# Altium PCB 超声波接近电路.PcbDoc
Units mil, origin at the board's own origin, x right, y up, seen from the top; angles counter-clockwise.
Board outline 6000 x 4000 mil, 2 copper layers (Top Layer, Bottom Layer); 48 components, 105 nets, 234 pads, 0 vias.
Unrouted connection lines stored in the file: 115.
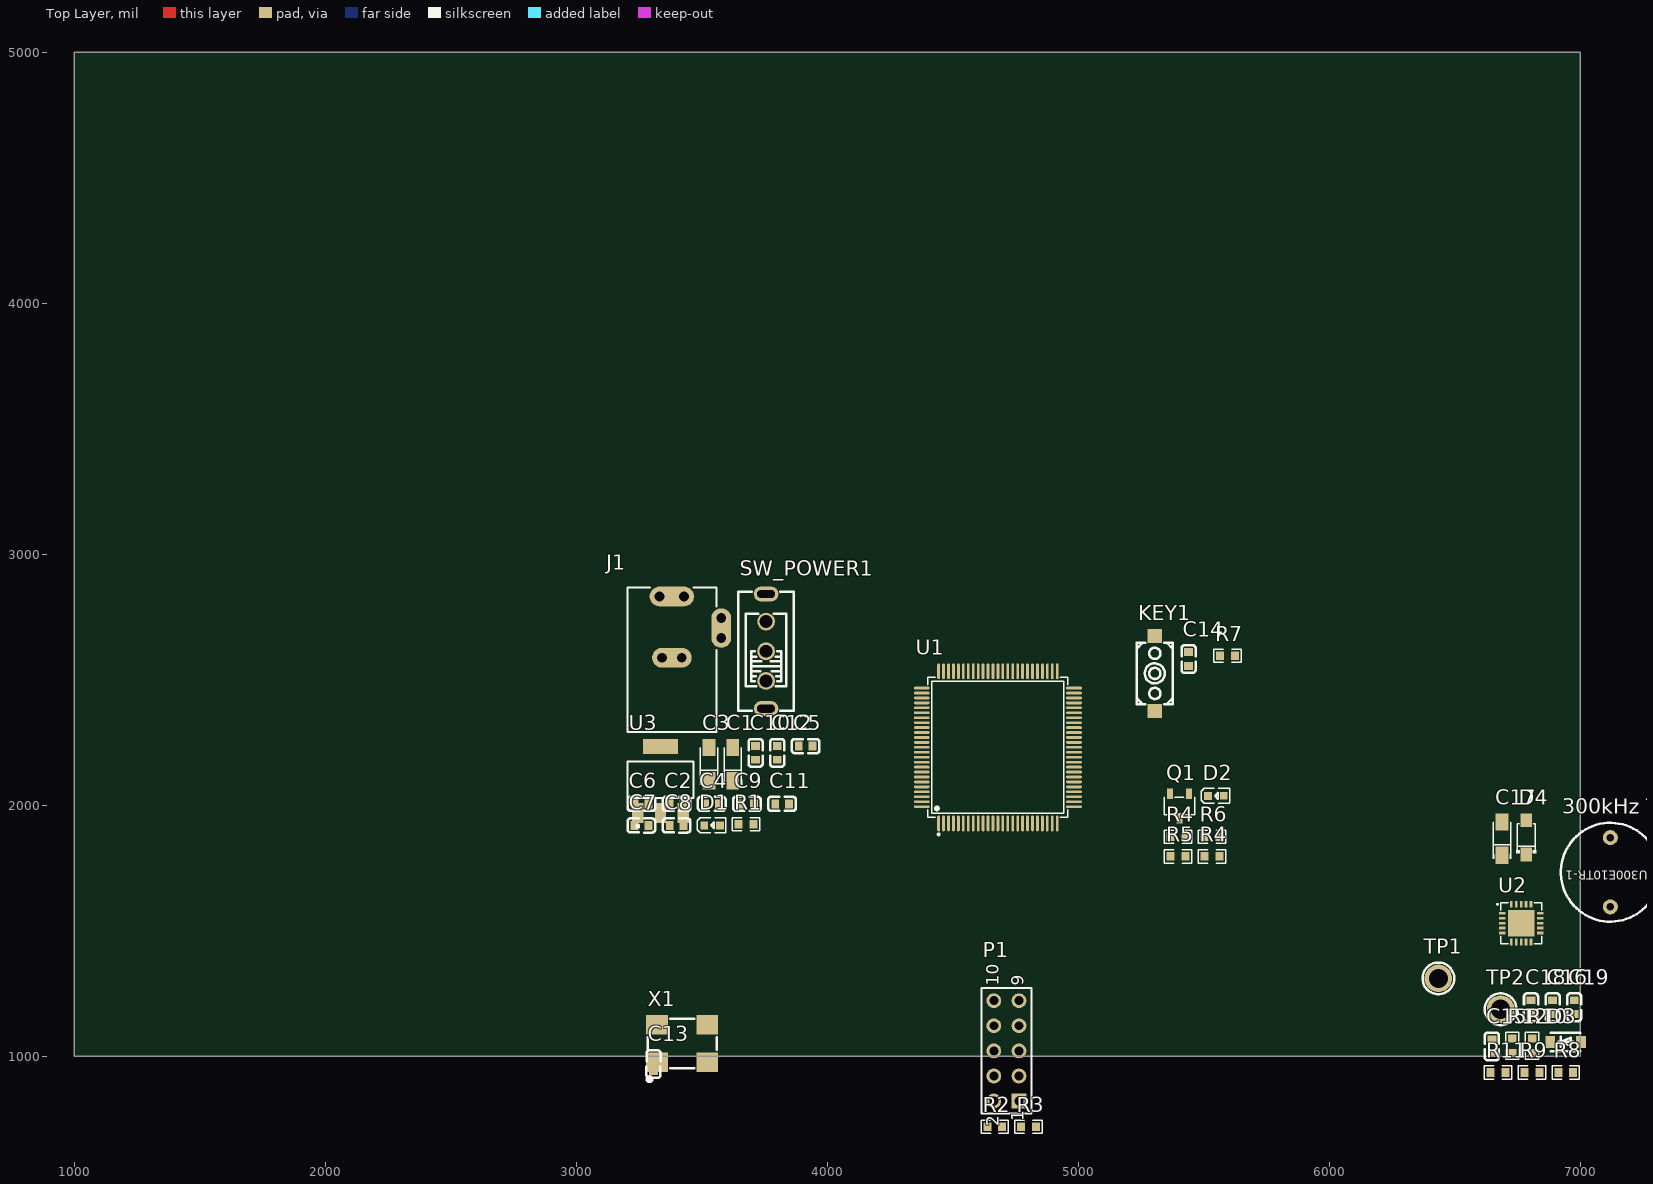
[diagram p0: Top Layer view]
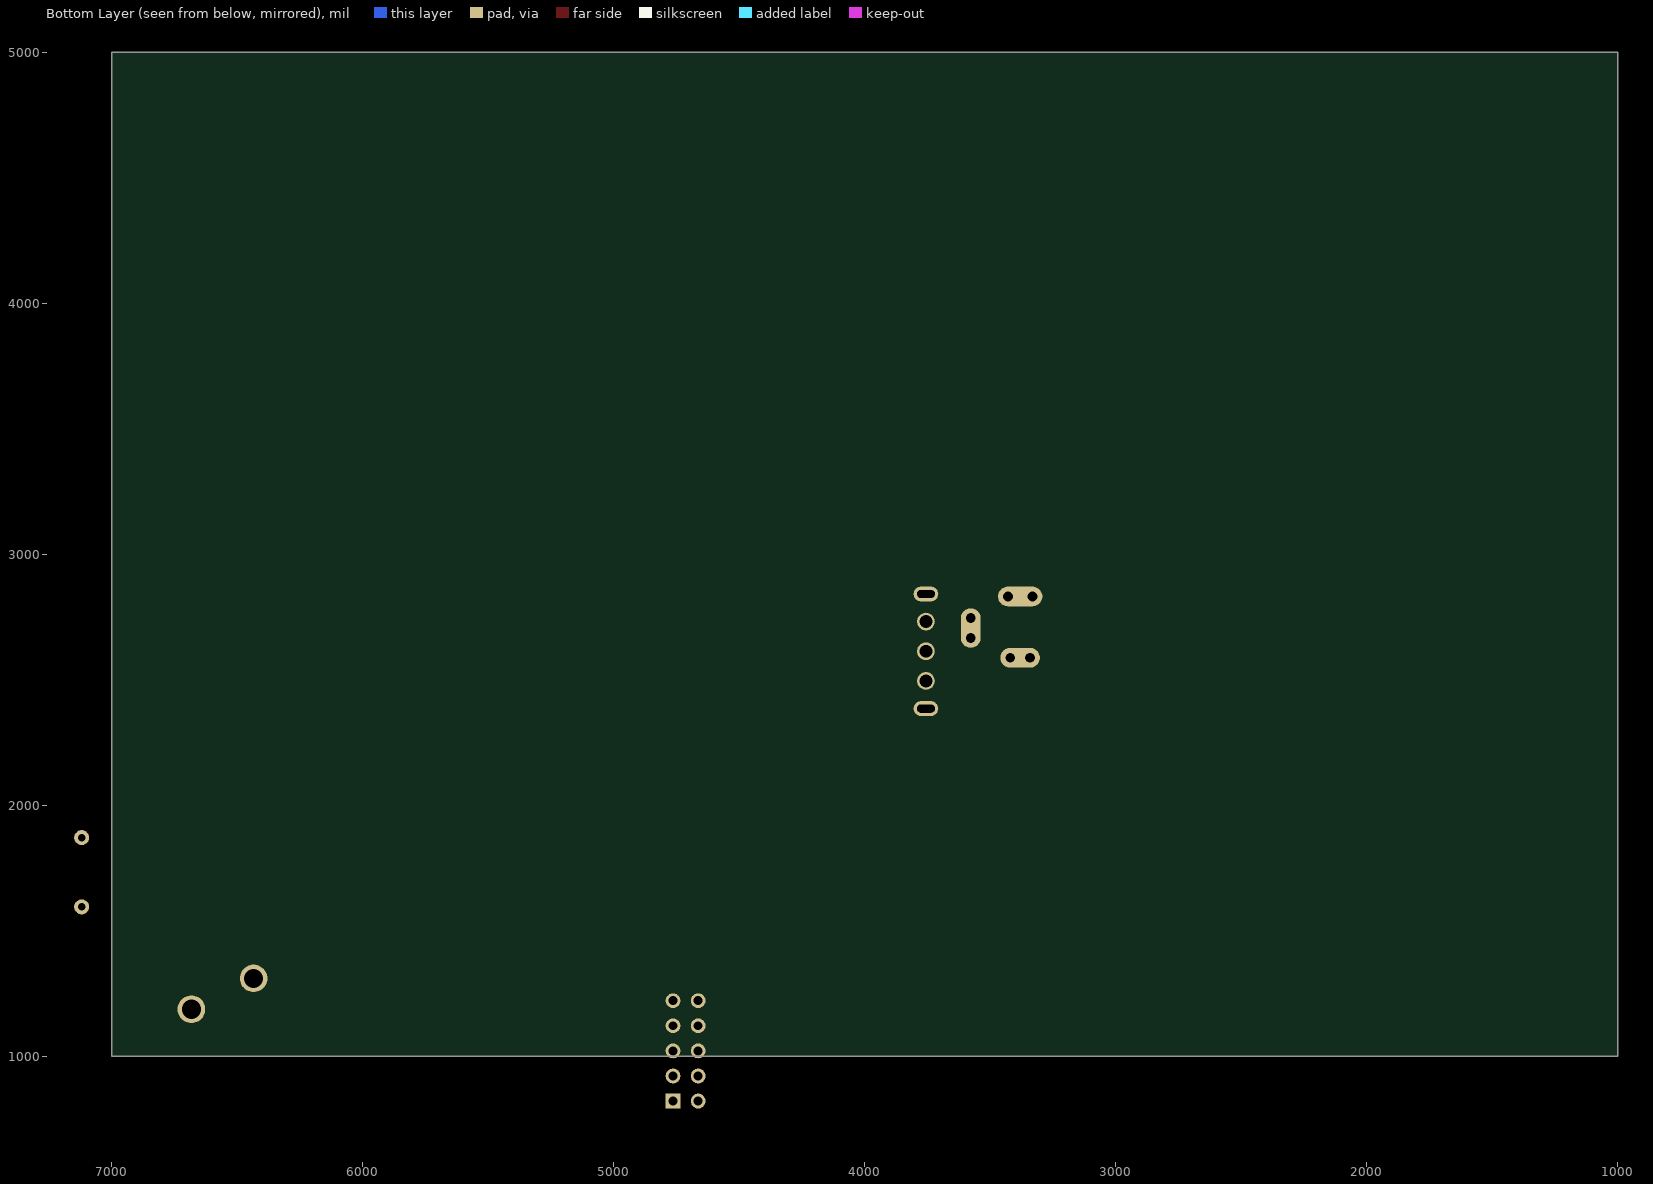
[diagram p1: Bottom Layer view, seen from below]

## Layer stack, top to bottom
Top Solder: solder mask 0.4, Solder Resist, Dk 3.5
Top Layer: signal copper 1.4
Dielectric 1: dielectric 12.6, FR-4, Dk 4.8
Bottom Layer: signal copper 1.4
Bottom Solder: solder mask 0.4, Solder Resist, Dk 3.5

## Board outline
1000,1000 7000,1000 7000,5000 1000,5000

## Design rules (kind name [scope] priority, off if disabled: settings)
Clearance [All] p1: gap=10 ignorepadtopadclearanceinfootprint=FALSE except(0: Arc-Hole Track-Hole SMDPad-Hole THPad-Hole Via-Hole Fill-Hole Poly-Hole Region-Hole Text-Hole)
PolygonConnect [All] p1: connectstyle=Relief reliefconductorwidth=10 reliefentries=4 polygonreliefangle="90 Angle" airgapwidth=10
RoomDefinition 超声波接近电路2-15 [InComponentClass('超声波接近电路2-15')] p1: confinementstyle=ConfineIn formatcopy=TRUE lockcomponents=FALSE outline 0,0 2000,0 2000,1000 0,1000
RoutingVias [All] p1: holewidth=28 width=50 viastyle="Through Hole" minholewidth=28 minwidth=50 maxholewidth=28 maxwidth=50
SolderMaskExpansion [All] p1: expansion=4 istentingtop=FALSE
Width [All] p1: maxlimit=10 minlimit=10 preferedwidth=10
30 further rules are at their usual default settings.

## Components (designator, comment, footprint, x,y, rotation, side; value= is the part's Value field where it differs from the comment)
"300kHz Transducer" "NU300E10TR-1" NU300E10TR-1 7120,1870.59 r180 top
C1 "Cap Pol1" CAP-SMD_L3.2-W1.6-RD 3624.14,2106.95 r90 top value=100uF
C2 "Cap" C0603 3372.84,2005.19 r0 top value=0.1uF
C3 "Cap Pol1" CAP-SMD_L3.2-W1.6-RD 3529.15,2106.95 r90 top value=100uF
C4 "Cap" C0603 3512.9,2005.19 r0 top value=0.1uF
C5 "Cap" C0603 3886.66,2235.16 r0 top value=0.01uF
C6 "Cap" C0603 3232.78,2005.19 r0 top value=0.01uF
C7 "Cap" C0603 3232.78,1919.07 r0 top value=0.01uF
C8 "Cap" C0603 3372.84,1919.07 r0 top value=0.01uF
C9 "Cap" C0603 3652.96,2005.19 r0 top value=0.01uF
C10 "Cap" C0603 3714.81,2181.04 r90 top value=0.01uF
C11 "Cap" C0603 3793.02,2005.19 r0 top value=0.01uF
C12 "Cap" C0603 3800.93,2181.04 r90 top value=0.01uF
C13 "Cap" C0603 3308.17,941.42 r90 top value=0.1uF
C14 "100nF" C0603 5440,2554.89 r90 top
C15 "100nF" C0603 6648.17,1011.74 r90 top
C16 "3.3nF" C0603 6890.27,1167.72 r90 top
C17 "2.2uF" CAP-SMD_L3.2-W1.6-RD 6688.21,1810.32 r90 top
C18 "330pF" C0603 6804.15,1167.72 r90 top
C19 "15nF" C0603 6976.39,1167.72 r90 top
D1 "LED0" LED0603-RD_RED 3470.24,1804.36 r0 top
D2 "MHT192UGCT" LED0603-RD_GREEN 5477.09,1997.12 r0 top
D3 "1N4001W" SOD-123F_L2.8-W1.8-LS3.7-RD 6962.88,861.75 r0 top
D4 "SMF36A_C353286" SOD-123FL_L2.7-W1.8-LS3.8-RD 3094.36,6980.16 r90 top
J1 "PWR2.5" KLD-0202 3381.1,2292.26 r90 top
KEY1 "K2-3.6×6.1_SMD" KEY-SMD_2P-L6.2-W3.6-LS8.0 5305,2525 r90 top
P1 "Header 5X2" HDR2X5 4763.94,821.06 r90 top
Q1 "BC817-40,215" SOT-23-3_L2.9-W1.6-P1.90-LS2.8-BR 55402.48,-25987.31 r90 top
R1 "Res2" R0603 3532.29,1883.22 r0 top value=1K
R2 "Res2" R0603 4522.88,678.12 r0 top value=1K
R3 "Res2" R0603 4657.94,678.12 r0 top value=1K
R4 "Res2" R0603 5387.94,1755.61 r0 top value=1K
R4 "470Ω" R0603 5252.88,1833.62 r0 top
R5 "20kΩ" R0603 5252.88,1755.61 r0 top
R6 "4.7kΩ" R0603 5387.94,1833.62 r0 top
R7 "1k" R0603 5450,2555 r0 top
R8 "10Ω" R0603 6798,894.95 r0 top
R9 "10kΩ" R0603 6662.94,894.95 r0 top
R10 "200Ω" R0603 6848.15,896.83 r90 top
R11 "0" R0603 6527.88,894.95 r0 top
R12 "0" R0603 6770.13,896.83 r90 top
SW_POWER1 "SS-12F44-G5" SW-TH_SS-12F44-G5 3756.56,2384.78 r90 top
TP1 "5009" TEST-TH_BD3.18-P1.93 6475,1270 r0 top
TP2 "5009" TEST-TH_BD3.18-P1.93 6722.99,1147.01 r0 top
U1 "EPM240T100C5N" TQFP-100_L14.0-W14.0-P0.50-LS16.0-BL 4795,2170 r0 top
U2 "TUSS4470TRTJR" QFN-20_L4.0-W4.0-P0.50-TL-EP2.7 -41641.58,-46941.66 r0 top
U3 "REG1117-3" ZZ311 3375.83,2039.32 r0 top
X1 "24MHz" OSC-SMD_4P-L7.0-W5.0-BL_SIT1602 3362.31,780.39 r0 top

## Footprints (in the part's own frame and the unit in brackets; to place one, negate y for a bottom-side part, rotate by r counter-clockwise, add the part's x,y. Pads: shape width x height; smd on the part's side, far side on the other; paste and mask are expansions set on the pad)
C0603 [mm]
  rect 0.8x0.9 smd: 1(0,0) 2(1.4,0)
  silkscreen extent -0.71,-0.71 2.09,0.72
CAP-SMD_L3.2-W1.6-RD [mil]
  rect 69.19x51.02 smd: 1(-10,0) 2(122.78,0)
  silkscreen extent -25,-37 122,37
HDR2X5 [mm] "Connector; Header; 5x2 Position"
  rect 1.5x1.5 hole 0.9: 1(0,0)
  round 1.5 hole 0.9: 2(0,2.54) 3(2.54,0) 4(2.54,2.54) 5(5.08,0) 6(5.08,2.54) 7(7.62,0) 8(7.62,2.54) 9(10.16,0) 10(10.16,2.54)
  silkscreen extent -1.27,-1.27 11.43,3.81
KEY-SMD_2P-L6.2-W3.6-LS8.0 [mm]
  rect 1.4x1.5 smd: 1(-3.8,0) 2(3.8,0)
  silkscreen extent -3.1,-1.8 3.1,1.8
KLD-0202 [mm] "DC Power Jack, 2.5mm, KLD Series, PCB Mount"
  oval 2x4.5 all layers, no hole: 1(13.7,0)
  round 1.5 hole 1: 1A(13.7,-1.25) 1B(13.7,1.25) 2A(7.5,-1) 2B(7.5,1) 3A(9.5,-5) 3B(11.5,-5)
  oval 2x4 all layers, no hole: 2(7.5,0)
  oval 4x2 all layers, no hole: 3(10.5,-5)
  silkscreen extent 0,-4.5 14.6,4.5
LED0603-RD_GREEN [mm]
  rect 0.8x0.8 smd: 1(1.016,1.016) 2(2.615,1.023)
  silkscreen extent 0.33,0.27 3.21,1.78
LED0603-RD_RED [mm]
  rect 0.8x0.8 smd: 1(1.016,2.921) 2(2.615,2.928)
  silkscreen extent 0.33,2.18 3.21,3.68
NU300E10TR-1 [mil]
  round 60 hole 30: 1(0,0) 2(0,275.59)
  silkscreen extent -197,-59 197,335
OSC-SMD_4P-L7.0-W5.0-BL_SIT1602 [mil]
  rect 86.61x78.74 smd: 1(-40,195) 2(160,195) 3(160,345) 4(-40,345)
  silkscreen extent -78,120 198,368
QFN-20_L4.0-W4.0-P0.50-TL-EP2.7 [mm]
  rect 0.665x0.28 smd: 1(1227.62,1232.18) 2(1227.62,1231.68) 3(1227.62,1231.18) 4(1227.62,1230.68) 5(1227.62,1230.18) 11(1231.435,1230.18) 12(1231.435,1230.68) 13(1231.435,1231.18) 14(1231.435,1231.68) 15(1231.435,1232.18)
  rect 0.28x0.665 smd: 6(1228.527,1229.273) 7(1229.027,1229.273) 8(1229.527,1229.273) 9(1230.027,1229.273) 10(1230.527,1229.273) 16(1230.527,1233.088) 17(1230.027,1233.088) 18(1229.527,1233.088) 19(1229.027,1233.088) 20(1228.527,1233.088)
  rect 2.7x2.7 smd: 21(1229.527,1231.18)
  silkscreen extent 1227.04,1229.1 1231.6,1233.26
R0603 [mil]
  rect 31.75x34.02 smd: 1(115,40) 2(174.31,40)
  silkscreen extent 90,14 199,66
SOD-123F_L2.8-W1.8-LS3.7-RD [mm]
  rect 1x1.2 smd: 1(-2.084,4.953) 2(1.016,4.953)
  silkscreen extent -2.05,4.02 0.96,5.9
SOD-123FL_L2.7-W1.8-LS3.8-RD [mm]
  rect 1.4x1.2 smd: 1(-131.486,-93.747) 2(-128.017,-93.747)
  silkscreen extent -131.36,-94.75 -128.38,-92.74
SOT-23-3_L2.9-W1.6-P1.90-LS2.8-BR [mm]
  rect 1.07x0.6 smd: 1(712.019,1269.025) 2(712.019,1270.925) 3(709.549,1269.975)
  silkscreen extent 709.91,1268.44 711.66,1271.51
SW-TH_SS-12F44-G5 [mm]
  round 1.8 hole 1.3: 1(2.8,0) 2(5.8,0) 3(8.8,0)
  oval 1.5x2.5 hole 0.8 slot 1.8 at 90 deg: 4(11.6,0) 5(0,0)
  silkscreen extent -0.2,-2.8 11.8,2.8
TEST-TH_BD3.18-P1.93 [mm]
  round 2.8 hole 1.93: 1(-1.016,1.016)
  silkscreen extent -2.62,-0.58 0.58,2.61
TQFP-100_L14.0-W14.0-P0.50-LS16.0-BL [mm]
  oval 0.28x1.6 smd: 1(-8.915,-6.166) 2(-8.415,-6.166) 3(-7.915,-6.166) 4(-7.415,-6.166) 5(-6.915,-6.166) 6(-6.415,-6.166) 7(-5.915,-6.166) 8(-5.415,-6.166) 9(-4.915,-6.166) 10(-4.415,-6.166) 11(-3.915,-6.166) 12(-3.415,-6.166) 13(-2.915,-6.166) 14(-2.415,-6.166) 15(-1.915,-6.166) 16(-1.415,-6.166) 17(-0.915,-6.166) 18(-0.415,-6.166) 19(0.085,-6.166) 20(0.585,-6.166) 21(1.085,-6.166) 22(1.585,-6.166) 23(2.085,-6.166) 24(2.585,-6.166) 25(3.085,-6.166) 51(3.085,9.234) 52(2.585,9.234) 53(2.085,9.234) 54(1.585,9.234) 55(1.085,9.234) 56(0.585,9.234) 57(0.085,9.234) 58(-0.415,9.234) 59(-0.915,9.234) 60(-1.415,9.234) 61(-1.915,9.234) 62(-2.415,9.234) 63(-2.915,9.234) 64(-3.415,9.234) 65(-3.915,9.234) 66(-4.415,9.234) 67(-4.915,9.234) 68(-5.415,9.234) 69(-5.915,9.234) 70(-6.415,9.234) 71(-6.915,9.234) 72(-7.415,9.234) 73(-7.915,9.234) 74(-8.415,9.234) 75(-8.915,9.234)
  oval 1.6x0.28 smd: 26(4.785,-4.466) 27(4.785,-3.966) 28(4.785,-3.466) 29(4.785,-2.966) 30(4.785,-2.466) 31(4.785,-1.966) 32(4.785,-1.466) 33(4.785,-0.966) 34(4.785,-0.466) 35(4.785,0.034) 36(4.785,0.534) 37(4.785,1.034) 38(4.785,1.534) 39(4.785,2.034) 40(4.785,2.534) 41(4.785,3.034) 42(4.785,3.534) 43(4.785,4.034) 44(4.785,4.534) 45(4.785,5.034) 46(4.785,5.534) 47(4.785,6.034) 48(4.785,6.534) 49(4.785,7.034) 50(4.785,7.534) 76(-10.615,7.534) 77(-10.615,7.034) 78(-10.615,6.534) 79(-10.615,6.034) 80(-10.615,5.534) 81(-10.615,5.034) 82(-10.615,4.534) 83(-10.615,4.034) 84(-10.615,3.534) 85(-10.615,3.034) 86(-10.615,2.534) 87(-10.615,2.034) 88(-10.615,1.534) 89(-10.615,1.034) 90(-10.615,0.534) 91(-10.615,0.034) 92(-10.615,-0.466) 93(-10.615,-0.966) 94(-10.615,-1.466) 95(-10.615,-1.966) 96(-10.615,-2.466) 97(-10.615,-2.966) 98(-10.615,-3.466) 99(-10.615,-3.966) 100(-10.615,-4.466)
  silkscreen extent -9.99,-7.37 4.16,8.61
ZZ311 [mil]
  rect 45x80 smd: 1(-130.55,-70.74) 2(-40,-70.74) 3(50.55,-70.74)
  rect 140x60 smd: 4(-40,195)
  silkscreen extent -172,-128 92,135

## Part data
C1 C3: "Polarized Capacitor (Radial)", LatestRevisionDate=17-Jul-2002, LatestRevisionNote="Re-released for DXP Platform.", PackageReference=RB7.6-15, Published=8-Jun-2000, Publisher="Altium Limited"
C2 C4 C5 C6 C7 C8 C9 C10 C11 C12 C13: "Capacitor", LatestRevisionDate=17-Jul-2002, LatestRevisionNote="Re-released for DXP Platform.", PackageReference=RAD-0.3, Published=8-Jun-2000, Publisher="Altium Limited"
C15: BOM_JLCPCB Part Class="Basic Part", BOM_Manufacturer=YAGEO, BOM_Manufacturer Part=CC0603KRX7R9BB104, BOM_Supplier=LCSC, BOM_Supplier Part=C14663, nameAlias=Capacitance, spicePre=C, spiceSymbolName=CC0603KRX7R9BB104
C16: BOM_JLCPCB Part Class="Extended Part", BOM_Manufacturer=MuRata, BOM_Manufacturer Part=GRM1885C1H332JA01D, BOM_Supplier=LCSC, BOM_Supplier Part=C77036, nameAlias=Capacitance, spicePre=C, spiceSymbolName=GRM1885C1H332JA01D
C17: library part 2.2uF_1, BOM_JLCPCB Part Class="Extended Part", BOM_Manufacturer=KEMET, BOM_Manufacturer Part=T491A225K035AT, BOM_Supplier=LCSC, BOM_Supplier Part=C122264, Contributor=LCSC, nameAlias=Capacitance, spicePre=C, spiceSymbolName=T491A225K035AT
C18: BOM_JLCPCB Part Class="Basic Part", BOM_Manufacturer=SAMSUNG, BOM_Manufacturer Part=CL10C331JB8NNNC, BOM_Supplier=LCSC, BOM_Supplier Part=C1664, nameAlias=Capacitance, spicePre=C, spiceSymbolName=CL10C331JB8NNNC
C19: BOM_JLCPCB Part Class="Extended Part", BOM_Manufacturer=YAGEO, BOM_Manufacturer Part=CC0603JRX7R9BB153, BOM_Supplier=LCSC, BOM_Supplier Part=C519550, Contributor=LCSC, nameAlias=Capacitance, spicePre=C, spiceSymbolName=CC0603JRX7R9BB153
D1: "Typical INFRARED GaAs LED", LatestRevisionDate=08-Jul-2005, LatestRevisionNote="Mech Layer 1 removed.", PackageReference=LED-0, Published=8-Jun-2000, Publisher="Altium Limited"
D2: BOM_JLCPCB Part Class="Extended Part", BOM_Manufacturer=MEIHUA, BOM_Manufacturer Part=MHT192UGCT, BOM_Supplier=LCSC, BOM_Supplier Part=C389519, Contributor=LCSC, spicePre=L, spiceSymbolName=MHT192UGCT
D3: BOM_JLCPCB Part Class="Extended Part", BOM_Manufacturer=Jingdao, BOM_Manufacturer Part=1N4001W, BOM_Supplier=LCSC, BOM_Supplier Part=C162732, Contributor=LCSC, spicePre=D, spiceSymbolName=1N4001W
D4: BOM_JLCPCB Part Class="Extended Part", BOM_Manufacturer="Shandong Jingdao Microelectronics", BOM_Manufacturer Part=SMF36A, BOM_Supplier=LCSC, BOM_Supplier Part=C353286, Contributor=LCSC, spicePre=D, spiceSymbolName=SMF36A_C353286
J1: "Low Voltage Power Supply Connector", ComponentLink1Description="Manufacturer Link", ComponentLink1URL=http://domino.kycon.com/internet/Products.html, DatasheetDocument=09-May-2002, Published=17-Dec-2003, Publisher="Altium Limited"
KEY1: BOM_Manufacturer Part=K2-1107ST-A4SW-06, BOM_Supplier=LCSC, BOM_Supplier Part=C118141, Contributor=LCEDA_Lib, spicePre=K, spiceSymbolName=K2-3.6×6.1_SMD, 制造商=韩国韩荣
P1: "Header, 5-Pin, Dual row", LatestRevisionDate=17-Jul-2002, LatestRevisionNote="Re-released for DXP Platform.", Publisher="Altium Limited"
Q1: BOM_JLCPCB Part Class="Extended Part", BOM_Manufacturer=Nexperia, BOM_Manufacturer Part=BC817-40,215, BOM_Supplier=LCSC, BOM_Supplier Part=C52801, spicePre=Q, spiceSymbolName=BC817-40,215
R1 R2 R3 R4: "Resistor", LatestRevisionDate=17-Jul-2002, LatestRevisionNote="Re-released for DXP Platform.", PackageReference=AXIAL-0.4, Published=8-Jun-2000, Publisher="Altium Limited"
R4: BOM_JLCPCB Part Class="Extended Part", BOM_Manufacturer=UniOhm, BOM_Manufacturer Part=0603WAJ0471T5E, Resistance (Ohms)=470, BOM_Supplier=LCSC, BOM_Supplier Part=C25241, nameAlias=Resistance, spicePre=R, spiceSymbolName=0603WAJ0471T5E
R5: BOM_JLCPCB Part Class="Basic Part", BOM_Manufacturer=UniOhm, BOM_Manufacturer Part=0603WAF2002T5E, Resistance (Ohms)=20K, BOM_Supplier=LCSC, BOM_Supplier Part=C4184, nameAlias=Resistance, spicePre=R, spiceSymbolName=0603WAF2002T5E
R6: BOM_JLCPCB Part Class="Basic Part", BOM_Manufacturer=UniOhm, BOM_Manufacturer Part=0603WAF4701T5E, Resistance (Ohms)=4.7K, BOM_Supplier=LCSC, BOM_Supplier Part=C23162, nameAlias=Resistance, spicePre=R, spiceSymbolName=0603WAF4701T5E
R8: BOM_JLCPCB Part Class="Extended Part", BOM_Manufacturer=PANASONIC, BOM_Manufacturer Part=ERJPA3J100V, Resistance (Ohms)=10, BOM_Supplier=LCSC, BOM_Supplier Part=C441879, Contributor=LCSC, nameAlias=Resistance, spicePre=R, spiceSymbolName=ERJPA3J100V
R9: BOM_JLCPCB Part Class="Basic Part", BOM_Manufacturer=UniOhm, BOM_Manufacturer Part=0603WAF1002T5E, Resistance (Ohms)=10K, BOM_Supplier=LCSC, BOM_Supplier Part=C25804, nameAlias=Resistance, spicePre=R, spiceSymbolName=0603WAF1002T5E
R10: BOM_JLCPCB Part Class="Extended Part", BOM_Manufacturer=PANASONIC, BOM_Manufacturer Part=ERJ-PA3F2000V, Resistance (Ohms)=200, BOM_Supplier=LCSC, BOM_Supplier Part=C254528, Contributor=LCSC, nameAlias=Resistance, spicePre=R, spiceSymbolName=ERJ-PA3F2000V
R11 R12: library part 0_1, BOM_JLCPCB Part Class="Extended Part", BOM_Manufacturer=YAGEO, BOM_Manufacturer Part=RC0603JR-070RL, Resistance=0Ω, BOM_Supplier=LCSC, BOM_Supplier Part=C95177, nameAlias="Resistance (Ohms)", spicePre=R, spiceSymbolName=RC0603JR-070RL
SW_POWER1: BOM_Manufacturer="Rectangular Connectors - Contacts", BOM_Manufacturer Part=SS-12F44-G5, BOM_Supplier=LCSC, BOM_Supplier Part=C136718, Contributor=LCSC, spicePre=S, spiceSymbolName=SS-12F44-G5
TP1 TP2: BOM_JLCPCB Part Class="Extended Part", BOM_Manufacturer=Keystone, BOM_Manufacturer Part=5009, BOM_Supplier=LCSC, BOM_Supplier Part=C238126, Contributor=LCSC, spicePre=U, spiceSymbolName=5009
U1: "MAX II 3.3/2.5V CPLD, 80 IOs, 240 Logic Elements, 100-Pin Plastic TQFP, Commercial Temperature, Speed Grade 5, Pb-Free", Supplier Part Number 1=544-1964-ND, Code_JEDEC=MS-026-AED, ComponentLink1Description="Manufacturer Link", ComponentLink1URL=http://www.altera.com/products/devices/cpld/max2/mx2-index.jsp, ComponentLink2Description=Handbook, ComponentLink2URL=http://www.altera.com/literature/hb/max2/max2_mii5v1.pdf, ComponentLink3Description="Packaging Specification", ComponentLink3URL=http://www.altera.com/literature/ds/dspkg.pdf, DatasheetVersion="ver1.8, Jul-2006", LatestRevisionDate=13-Apr-2006, LatestRevisionNote="IPC-7351 Footprint Added.", Note="Each set of VCCIO pins can be connected to 3.3V, 2.5V, 1.8V, or 1.5V.", PackageDescription="100-Pin Plastic Thin Quad Flat Pack (TQFP100) - Wire Bond", PackageReference=TQFP100, PackageVersion="ver15.1, May-2008", Published=4-Mar-2005, Publisher="Altium Limited", Supplier 1=Digi-Key, Supplier 2=Farnell, Supplier 3=Farnell, Supplier Part Number 2=1662268, Supplier Part Number 3=1453503
U2: library part CMP-0081414-4, "Ultrasonic Sensor Signal Conditioner IC for Directly", Alternate Manufacturer="Texas Instruments", Alternate PartNumber=PGA44801RTJT, AEC Category=Q200, AEC Qualified=N, ComponentLink1Description="Datasheet Link", ComponentLink1URL=http://www.ti.com/lit/ds/symlink/pga448.pdf, ComponentLink2Description="Product Folder", ComponentLink2URL=http://www.ti.com/product/pga448, ComponentLink3Description="Online Datasheet", ComponentLink3URL=http://www.ti.com/product/pga448/datasheet, CompType=IC, Manufacturer="Texas Instruments", MountType=SMT, PackageDescription=WQFN-20, PackageReference=RTJ0020J, PartNumber=TUSS4470TRTJR, SizeArea_mm2=16, SizeAreaWB_mm2=25, SizeX_mm=4, SizeY_mm=4, SizeZ_mm=0.8
U3: "800mA Low Dropout Positive Regulator Fixed 2.85V,3V,3.3V and 5V", ComponentLink1Description="Manufacturer Link", ComponentLink1URL=http://www.ti.com/, ComponentLink2Description=Datasheet, ComponentLink2URL=http://www-s.ti.com/sc/ds/reg1117.pdf, DatasheetVersion=1994, LatestRevisionDate=17-Jul-2002, LatestRevisionNote="Re-released for DXP Platform.", PackageDescription="SOT-223/SC-73; 4 Leads; Body 6.7 x 7.3 mm, inc. leads (LxW max)", PackageReference=ZZ311, PackageVersion=revC, Published=8-Jun-2000, Publisher="Altium Limited"
X1: library part oscillator
C14: Contributor=LCEDA_Lib, nameAlias=Value(F), spicePre=C, spiceSymbolName=C_0603_US
R7: Contributor=LCEDA_Lib, nameAlias=Value(Ω), spicePre=R, spiceSymbolName=R_0603_EU

## Nets (pads, with @x,y where several pads share a name; then routed paths per layer and width w, separated by ;. In a path a pad name is that pad's centre, name@x,y a point inside that pad or via, vN(x,y) a via of type N, cw(c..) or ccw(c..) an arc to the next point about the centre after c; other vN are vias at no path point)
DGND: R11.1 U2.2
GND: C1.2 C2.2 C3.2 C4.2 C5.1 C6.1 C7.1 C8.1 C9.1 C10.1 C11.1 C12.1 C13.1 C14.2 C15.2 C17.2 D1.2 D4.2 J1.2 J1.2A J1.2B J1.3 J1.3A J1.3B KEY1.2 P1.2 P1.10 Q1.2 R4.1@5502.94,1795.61 R5.1 R11.2 R12.2 SW_POWER1.3 TP2.1 U1.10 U1.11 U1.32 U1.46 U1.60 U1.65 U1.79 U1.93 U2.14 U2.21 U3.1 X1.2
NetC1_1: C1.1 C2.1 SW_POWER1.2 U3.3
NetC14_1: C14.1 R7.1
NetC15_1: C15.1 D4.1 R8.2 U2.20
NetC16_1: C16.1 U2.18
NetC17_1: C17.1 U2.17
NetC18_1: C18.1 U2.12
NetC18_2: C18.2 R10.1
NetC19_1: C19.1 U2.11
NetD1_1: D1.1 R1.1
NetD2_2: D2.2 R6.1
NetD3_1: D3.1 R8.1
NetJ1_1: J1.1 J1.1A J1.1B SW_POWER1.1
NetQ1_1: Q1.1 R4.2@5427.19,1873.62 R5.2
P1: U1.1
P2: U1.2
P3: U1.3
P4: U1.4
P5: U1.5
P6: U1.6
P7: U1.7
P8: U1.8
P12: U1.12 X1.3
P14: U1.14
P15: U1.15
P16: U1.16
P17: U1.17
P18: U1.18
P19: U1.19
P20: U1.20
P21: U1.21
P26: R4.1@5367.88,1873.62 U1.26
P27: D2.1 Q1.3 U1.27
P28: U1.28 U2.7
P29: U1.29 U2.8
P30: U1.30 U2.1
P33: U1.33 U2.19
P34: U1.34 U2.4
P35: U1.35 U2.5
P36: U1.36 U2.6
P37: U1.37 U2.3
P38: U1.38
P39: U1.39
P40: U1.40
P41: U1.41
P42: U1.42
P43: U1.43
P44: KEY1.1 U1.44
P47: U1.47
P48: U1.48
P49: U1.49
P50: U1.50
P51: U1.51
P52: U1.52
P53: U1.53
P54: U1.54
P55: U1.55
P56: U1.56
P57: U1.57
P58: U1.58
P61: U1.61
P62: U1.62
P64: U1.64
P66: U1.66
P67: U1.67
P68: U1.68
P69: U1.69
P70: U1.70
P71: U1.71
P72: U1.72
P73: U1.73
P74: U1.74
P75: U1.75
P76: U1.76
P77: U1.77
P78: U1.78
P81: U1.81
P82: U1.82
P83: U1.83
P84: U1.84
P85: U1.85
P86: U1.86
P87: U1.87
P88: U1.88
P89: U1.89
P90: U1.90
P91: U1.91
P92: U1.92
P95: U1.95
P96: U1.96
P97: U1.97
P98: U1.98
P99: U1.99
P100: U1.100
SGND: C16.2 C19.2 R12.1 U2.13
TCK: P1.1 R4.2@5562.25,1795.61 U1.24
TDI: P1.9 R3.1 U1.23
TDO: P1.3 U1.25
TMS: P1.5 R2.1 U1.22
VCC: D3.2 R6.2
VCC3.3: C3.1 C4.1 C5.2 C6.2 C7.2 C8.2 C9.2 C10.2 C11.2 C12.2 C13.2 P1.4 R1.2 R2.2 R3.2 R7.2 U1.9 U1.13 U1.31 U1.45 U1.59 U1.63 U1.80 U1.94 U2.10 U3.2 U3.4 X1.4
VOUT: TP1.1 U2.9
X+: "300kHz Transducer.2" R9.1 R10.2 U2.15
X-: "300kHz Transducer.1" R9.2 U2.16
pads on no net: P1.6 P1.7 P1.8 SW_POWER1.4 SW_POWER1.5 X1.1

## Text inside footprints (layer, text, board x,y; h text height)
J1: Mechanical 1 "Mech 2 - Clearance, move to internal plane if present" at 3181.66,2303.52 h11.81 r90; Mechanical 1 "Mech 1 - Slot cut-out" at 3161.97,2303.52 h11.81 r90; Mechanical 1 "Assign keep-out area to slot" at 3122.6,2303.52 h11.81 r90; Mechanical 1 "Alert PCB fab to slot details" at 3142.29,2303.52 h11.81 r90
P1: Top Overlay "10" at 4683.94,1281.06 h50 r90; Top Overlay "9" at 4783.94,1281.06 h50 r90; Top Overlay "1" at 4783.94,741.06 h50 r90; Top Overlay "2" at 4683.94,721.06 h50 r90